# EAGLE board SpiCurrent-beefy (EAGLE 7.2.0)
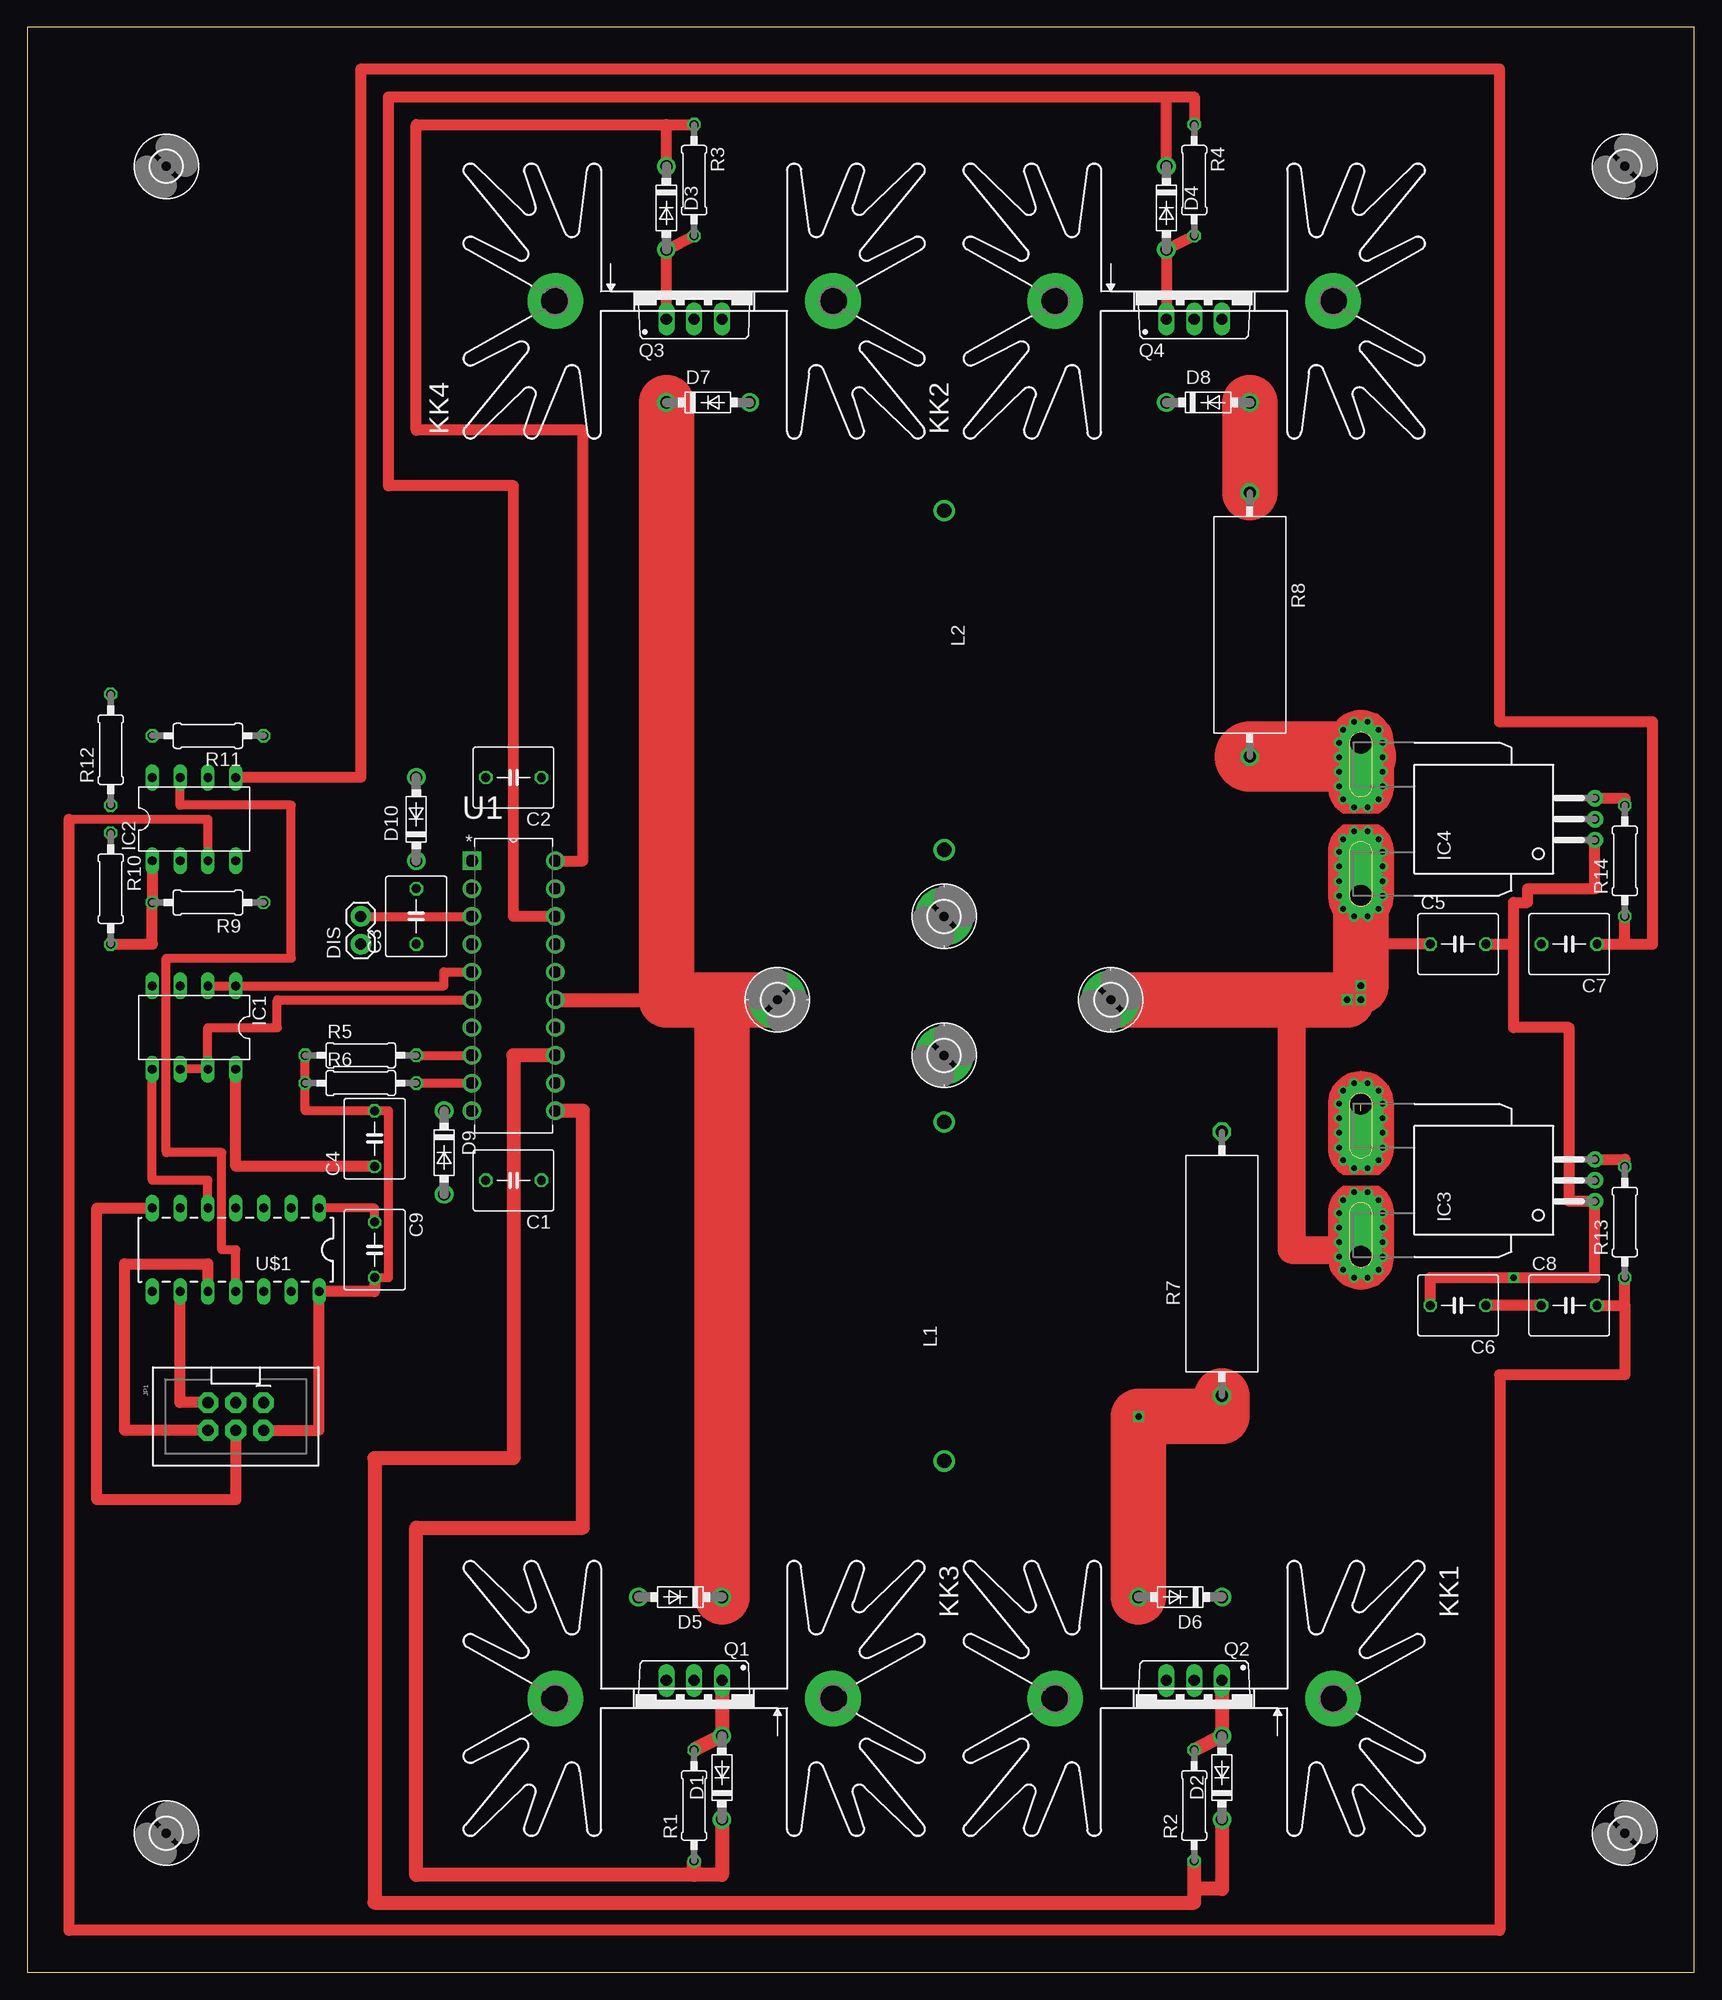
[diagram p0: board, top side]
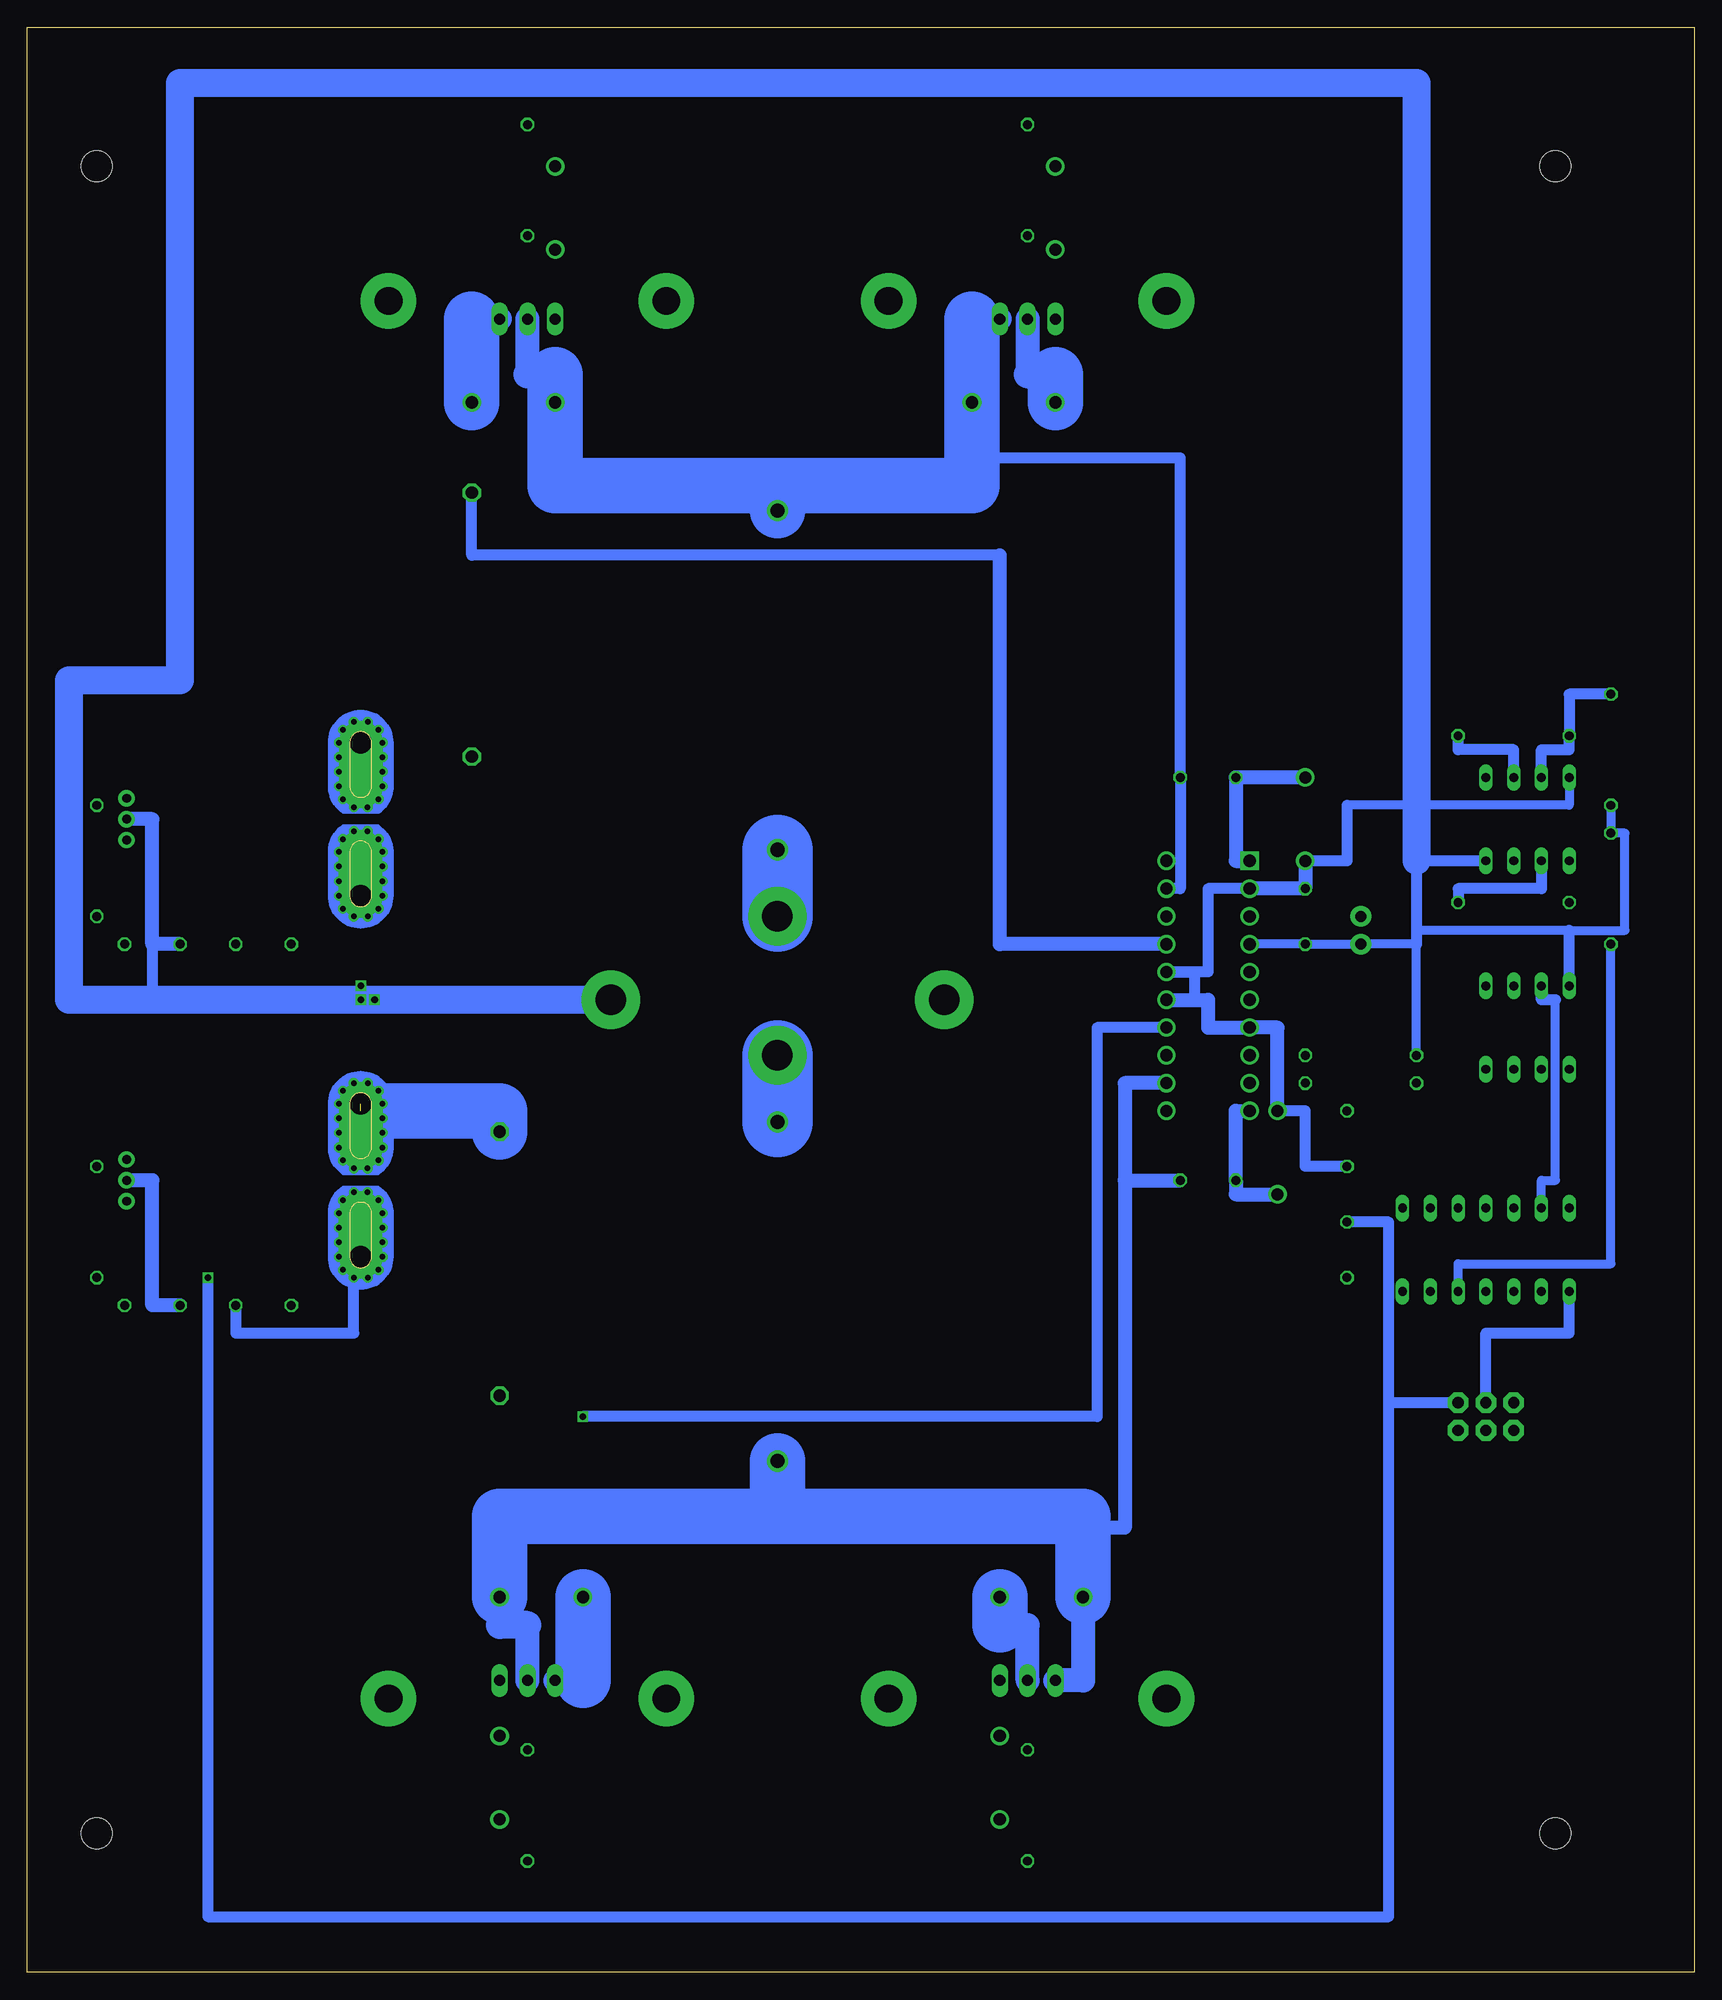
[diagram p1: board, bottom side, seen from below]

Size 152.4 x 177.8 mm. Coordinates in mm from the lower left corner, seen from the top.
Outline: 0,0 152.4,0 152.4,177.8 0,177.8 0,0
Copper layers (1*16): Top 0.0356mm / dielectric 1.5011mm / Bottom 0.0356mm
Design rules "LaenPCBOrder-bigtesting": minimum track width 10mil, minimum drill 13mil, track to track 10mil, track to pad 10mil, pad to pad 10mil, via to via 10mil, smd to smd 10mil, copper to edge 15mil, drill to drill 6mil, minimum pad ring 7mil, minimum via ring 7mil, stop-mask expansion 3mil, vias tented up to drill 0mil, thermal gap 20mil

## Footprints (pad centres in the part's own frame; a part is rotated, then mirrored left to right if it is on the bottom)
C050-055X075 = drill 0.813 octagon: 1 -2.54,0; 2 2.54,0
DO41-7.6 = drill 1.1 pad 1.7: A 3.81,0; C -3.81,0
1X02 = drill 1.016 pad 1.88: 1 0,0; 2 2.54,0
2,8-PAD = drill 2.8 pad 5.334: B2,8 0,0
2,8 = hole 2.8: 0,0
DIL08 = drill 0.813 long: 1 -3.81,-3.81; 2 -1.27,-3.81; 3 1.27,-3.81; 4 3.81,-3.81; 5 3.81,3.81; 6 1.27,3.81; 7 -1.27,3.81; 8 -3.81,3.81
CB-PFF = drill 0.8 pad 1.5: 1 -1.91,-21.4; 2 0,-21.4; 3 1.91,-21.4 | drill 2 pad 4 offset: IP+ 7,0; IP- -7,0 | drill 0.5 pad 0.9: IP+@2 8.89,0.635; IP+@3 8.89,-0.635; IP+@4 8.175,-1.625; IP+@5 7,-2; IP+@6 5.675,-2; IP+@7 4.35,-2; IP+@8 3,-2; IP+@9 1.825,-1.625; IP+@10 1.1,-0.625; IP+@11 1.1,0.625; IP+@12 1.825,1.625; IP+@13 3,2; IP+@14 4.35,2; IP+@15 5.675,2; IP+@16 7,2; IP+@17 8.175,1.625; IP-@2 -8.89,0.635; IP-@3 -8.89,-0.635; IP-@4 -8.175,-1.625; IP-@5 -7,-2; IP-@6 -5.675,-2; IP-@7 -4.325,-2; IP-@8 -3,-2; IP-@9 -1.825,-1.625; IP-@10 -1.1,-0.625; IP-@11 -1.1,0.625; IP-@12 -1.825,1.625; IP-@13 -3,2; IP-@14 -4.325,2; IP-@15 -5.675,2; IP-@16 -7,2; IP-@17 -8.175,1.625
2X3-SPI-SHROUDED = drill 1.016 pad 1.88 octagon: 1 -1.27,2.54; 2 1.27,2.54; 3 -1.27,0; 4 1.27,0; 5 -1.27,-2.54; 6 1.27,-2.54
529XXXXXXXX = drill 2.54 pad 5.08: A2,5 -12.7,-0.889; B2,5 12.7,-0.889
TJ6-U2 = drill 1.3: 1 -15.5,0; 2 15.5,0
TO220BV = drill 1.016 long: D 0,-2.54; G -2.54,-2.54; S 2.54,-2.54
0207/10 = drill 0.813 octagon: 1 -5.08,0; 2 5.08,0
VTA54 = drill 1.1 octagon: 1 -12.065,0; 2 12.065,0
DIP254P762X533-20 = drill 1.118 square: 1 -7.62,22.86 | drill 1.118: 2 -7.62,20.32; 3 -7.62,17.78; 4 -7.62,15.24; 5 -7.62,12.7; 6 -7.62,10.16; 7 -7.62,7.62; 8 -7.62,5.08; 9 -7.62,2.54; 10 -7.62,0; 11 0,0; 12 0,2.54; 13 0,5.08; 14 0,7.62; 15 0,10.16; 16 0,12.7; 17 0,15.24; 18 0,17.78; 19 0,20.32; 20 0,22.86
DIL14 = drill 0.813 long: 1 -8.89,-3.81; 2 -6.35,-3.81; 3 -3.81,-3.81; 4 -1.27,-3.81; 5 1.27,-3.81; 6 3.81,-3.81; 7 6.35,-3.81; 8 6.35,3.81; 9 3.81,3.81; 10 1.27,3.81; 11 -1.27,3.81; 12 -3.81,3.81; 13 -6.35,3.81; 14 -8.89,3.81

## Placement (x,y rotation side)
C1  15-22uf  [C050-055X075]  44.45,72.39 180 top
C2  15-22uf  [C050-055X075]  44.45,109.22 180 top
C3  22uf  [C050-055X075]  35.56,96.52 90 top
C4  4.7uf  [C050-055X075]  31.75,76.2 90 top
C5  0.1uf  [C050-055X075]  130.81,93.98 0 top
C6  0.1uf  [C050-055X075]  130.81,60.96 180 top
C7  ??  [C050-055X075]  140.97,93.98 180 top
C8  ??  [C050-055X075]  140.97,60.96 0 top
C9  0.1uf  [C050-055X075]  31.75,66.04 270 top
D1  1N5819-B  [DO41-7.6]  63.5,17.78 90 top
D2  1N5819-B  [DO41-7.6]  109.22,17.78 90 top
D3  1N5819-B  [DO41-7.6]  58.42,161.29 270 top
D4  1N5819-B  [DO41-7.6]  104.14,161.29 270 top
D5  1N5822  [DO41-7.6]  59.69,34.29 180 top
D6  1N5822  [DO41-7.6]  105.41,34.29 180 top
D7  1N5822  [DO41-7.6]  62.23,143.51 0 top
D8  1N5822  [DO41-7.6]  107.95,143.51 0 top
D9  1N5819-B  [DO41-7.6]  38.1,74.93 270 top
D10  1N5819-B  [DO41-7.6]  35.56,105.41 90 top
DIS  M02PTH  [1X02]  30.48,93.98 90 top
H1  MOUNT-PAD-ROUND2.8  [2,8-PAD]  68.58,88.9 270 top
H2  MOUNT-PAD-ROUND2.8  [2,8-PAD]  99.06,88.9 180 top
H3  MOUNT-PAD-ROUND2.8  [2,8-PAD]  83.82,83.82 0 top
H4  MOUNT-PAD-ROUND2.8  [2,8-PAD]  83.82,96.52 0 top
H5  MOUNT-HOLE2.8  [2,8]  12.7,12.7 0 top
H6  MOUNT-HOLE2.8  [2,8]  146.05,165.1 0 top
H7  MOUNT-HOLE2.8  [2,8]  146.05,12.7 0 top
H8  MOUNT-HOLE2.8  [2,8]  12.7,165.1 0 top
IC1  AD822N  [DIL08]  15.24,86.36 180 top
IC2  AD822N  [DIL08]  15.24,105.41 0 top
IC3  ACS758LCB-050B-PFF-T  [CB-PFF]  121.92,72.39 90 top
IC4  ACS758LCB-050B-PFF-T  [CB-PFF]  121.92,105.41 90 top
JP1  [2X3-SPI-SHROUDED]  19.05,50.8 270 top
KK1  TO-220/218-529XXXXXXXX  [529XXXXXXXX]  106.68,24.13 180 top
KK2  TO-220/218-529XXXXXXXX  [529XXXXXXXX]  106.68,153.67 0 top
KK3  TO-220/218-529XXXXXXXX  [529XXXXXXXX]  60.96,24.13 180 top
KK4  TO-220/218-529XXXXXXXX  [529XXXXXXXX]  60.96,153.67 0 top
L1  ~10uH?  [TJ6-U2]  83.82,62.23 90 top
L2  ~10uH?  [TJ6-U2]  83.82,118.11 270 top
Q1  [TO220BV]  60.96,24.13 180 top
Q2  [TO220BV]  106.68,24.13 180 top
Q3  [TO220BV]  60.96,153.67 0 top
Q4  [TO220BV]  106.68,153.67 0 top
R1  10  [0207/10]  60.96,15.24 90 top
R2  10  [0207/10]  106.68,15.24 90 top
R3  10  [0207/10]  60.96,163.83 270 top
R4  10  [0207/10]  106.68,163.83 270 top
R5  100K  [0207/10]  30.48,83.82 0 top
R6  100K  [0207/10]  30.48,81.28 0 top
R7  1 >5W  [VTA54]  109.22,64.77 90 top
R8  1 >5W  [VTA54]  111.76,123.19 270 top
R9  100K  [0207/10]  16.51,97.79 180 top
R10  150K  [0207/10]  7.62,99.06 270 top
R11  100K  [0207/10]  16.51,113.03 180 top
R12  150K  [0207/10]  7.62,111.76 90 top
R13  ??  [0207/10]  146.05,68.58 90 top
R14  ??  [0207/10]  146.05,101.6 90 top
U1  HIP4081AIPZ  [DIP254P762X533-20]  48.26,78.74 0 top
U$1  ATTINY84ATTINY84-20PU  [DIL14]  17.78,66.04 180 top

## Library data of the parts
C1-C9 L1 L2 = rcl
D1-D10 = diode-custom
DIS = SparkFun-Connectors
H1-H4 = holes-custom
H5-H8 = holes
IC1 IC2 = analog-devices; OC_FARNELL: 1438581; OC_NEWARK: unknown
IC3 IC4 = allegro; MPN: ACS758LCB-050B-PFF-T; OC_FARNELL: 1718997; OC_NEWARK: 04R7131
JP1 = CustomParts; PROD_ID: CONN-10681
KK1-KK4 = heatsink-aavid
Q1-Q4 = transistor-power
R1-R4 = resistor
R5-R14 = resistor-custom
U1 = Intersil_By_element14_Batch_1; MPN: HIP4081AIPZ; OC_FARNELL: 9664130; OC_NEWARK: 57K3817; PACKAGE: DIP-20; SUPPLIER: INTERSIL
U$1 = SparkFun-DigitalIC

## Nets
+5V: C5.2 C6.2 C9.1 IC3.1 IC4.1 JP1.1 U$1.1
+12V: C3.2 C4.1 D5.C D7.C D9.C D10.C H1.B2,8 IC1.8 IC2.8 Q1.D Q3.D U1.2 U1.7 U1.15 U1.16
GND: C3.1 C4.2 C5.1 C6.1 C7.2 C8.1 C9.2 DIS.1 H2.B2,8 IC1.4 IC2.4 IC3.2 IC3.IP- IC3.IP-@2 IC3.IP-@3 IC3.IP-@4 IC3.IP-@5 IC3.IP-@6 IC3.IP-@7 IC3.IP-@8 IC3.IP-@9 IC3.IP-@10 IC3.IP-@11 IC3.IP-@12 IC3.IP-@13 IC3.IP-@14 IC3.IP-@15 IC3.IP-@16 IC3.IP-@17 IC4.2 IC4.IP- IC4.IP-@2 IC4.IP-@3 IC4.IP-@4 IC4.IP-@5 IC4.IP-@6 IC4.IP-@7 IC4.IP-@8 IC4.IP-@9 IC4.IP-@10 IC4.IP-@11 IC4.IP-@12 IC4.IP-@13 IC4.IP-@14 IC4.IP-@15 IC4.IP-@16 IC4.IP-@17 JP1.2 R5.1 R6.1 R10.1 R12.1 U1.4 U$1.14
N$1: IC1.1 IC1.2 U1.5
N$2: IC1.6 IC1.7 U1.6
N$3: D3.C R3.1 U1.20
N$4: D3.A Q3.G R3.2
N$5: D4.C R4.1 U1.18
N$6: D4.A Q4.G R4.2
N$7: D2.C R2.1 U1.13
N$8: D2.A Q2.G R2.2
N$9: D1.C R1.1 U1.11
N$10: D1.A Q1.G R1.2
N$11: C1.1 D5.A D6.C L1.1 Q1.S Q2.D U1.12
N$12: R5.2 U1.8
N$13: R6.2 U1.9
N$14: C2.1 D7.A D8.C L2.1 Q3.S Q4.D U1.19
N$15: D6.A Q2.S R7.1 U1.14
N$16: D8.A Q4.S R8.1 U1.17
N$17: C1.2 D9.A U1.10
N$18: C2.2 D10.A U1.1
N$19: DIS.2 U1.3
N$20: JP1.4 U$1.7
N$21: JP1.3 U$1.8
N$22: JP1.5 U$1.9
N$23: JP1.6 U$1.10
N$24: IC1.5 U$1.5
N$25: IC1.3 U$1.6
N$26: IC2.2 R9.1
N$27: IC4.IP+ IC4.IP+@2 IC4.IP+@3 IC4.IP+@4 IC4.IP+@5 IC4.IP+@6 IC4.IP+@7 IC4.IP+@8 IC4.IP+@9 IC4.IP+@10 IC4.IP+@11 IC4.IP+@12 IC4.IP+@13 IC4.IP+@14 IC4.IP+@15 IC4.IP+@16 IC4.IP+@17 R8.2
N$28: IC2.1 R9.2 R10.2 U$1.12
N$29: IC2.7 R11.2 R12.2 U$1.11
N$30: IC2.6 R11.1
N$31: IC3.IP+ IC3.IP+@2 IC3.IP+@3 IC3.IP+@4 IC3.IP+@5 IC3.IP+@6 IC3.IP+@7 IC3.IP+@8 IC3.IP+@9 IC3.IP+@10 IC3.IP+@11 IC3.IP+@12 IC3.IP+@13 IC3.IP+@14 IC3.IP+@15 IC3.IP+@16 IC3.IP+@17 R7.2
N$32: C8.2 IC2.3 R13.1
N$33: C7.1 IC2.5 R14.1
N$34: IC3.3 R13.2
N$35: IC4.3 R14.2
N$36: H3.B2,8 L1.2
N$37: H4.B2,8 L2.2

## Tracks (layer width: path | path; a pad name or v marks a point on that pad's centre or on a via)
+5V  (via drill 0.6)
  Top 0.813: C9.1 31.75,69.85 U$1.1
  Top 1.016: IC4.1 143.32,99.06 137.16,99.06 137.16,97.79 135.89,97.79 135.89,93.98 | C6.2 128.27,63.5 v135.89,63.5 143.32,63.5 IC3.1 140.97,70.48 140.97,86.36 135.89,86.36 135.89,93.98 | C5.2 135.89,93.98
  Bottom 1.016: v135.89,63.5 135.89,5.08 27.94,5.08 27.94,52.07 | 27.94,52.07 JP1.1 | 27.94,52.07 27.94,68.58 C9.1
+12V
  Top 1.016: C4.1 19.05,73.66 IC1.8
  Top 1.27: U1.15 58.42,88.9
  Top 5.08: D5.C 63.5,88.9 | 63.5,88.9 H1.B2,8 | 63.5,88.9 58.42,88.9 D7.C
  Bottom 0.813: IC2.8 11.43,106.68 31.75,106.68
  Bottom 1.016: C4.1 35.56,73.66 35.56,78.74 D9.C | U1.2 44.45,99.06 44.45,91.44 U1.16 45.72,91.44 45.72,88.9 | 31.75,106.68 31.75,101.6 D10.C
  Bottom 1.27: U1.15 45.72,88.9 44.45,88.9 44.45,86.36 U1.7 38.1,86.36 D9.C | U1.2 C3.2 D10.C
  Bottom 2.184: Q3.D 60.96,146.05 | Q1.D 60.96,31.75 63.5,31.75
  Bottom 2.54: 60.96,146.05 58.42,146.05
  Bottom 5.08: 58.42,146.05 D7.C | 63.5,31.75 D5.C
GND  (via drill 0.6)
  Top 0.813: R5.1 R6.1 25.4,78.74 C4.2 33.02,78.74 33.02,63.5 C9.2
  Top 1.016: C8.1 C6.1 | C9.2 31.75,62.23 U$1.14 26.67,49.53 JP1.2 | C5.1 121.92,93.98
  Top 2.54: v121.92,90.17 v121.92,88.9 v120.65,88.9 | 115.57,88.9 115.57,66.04 121.92,66.04 IC3.IP-
  Top 5.08: H2.B2,8 115.57,88.9 v120.65,88.9 | v121.92,90.17 121.92,93.98 IC4.IP-
  Bottom 0.813: R5.1 25.4,93.98 DIS.1 C3.1 U1.4 | R12.1 R10.1 6.35,104.14 6.35,95.25 11.43,95.25 25.4,95.25
  Bottom 1.016: C6.1 133.35,58.42 122.56,58.42 IC3.IP-@3 | 25.4,93.98 25.4,95.25 25.4,101.6 IC2.4 | IC1.4 11.43,95.25 | 140.97,93.98 140.97,88.9
  Bottom 1.27: C7.2 140.97,93.98 140.97,105.41 IC4.2 | C8.1 140.97,60.96 140.97,72.39 IC3.2
  Bottom 2.54: H2.B2,8 140.97,88.9 148.59,88.9 148.59,118.11 138.43,118.11 138.43,172.72 25.4,172.72 25.4,101.6
N$1
  Top 0.813: IC1.2 IC1.1 38.1,90.17 38.1,91.44 U1.5
N$2
  Top 0.813: U1.6 22.86,88.9 22.86,86.36 16.51,86.36 IC1.7 IC1.6
N$3
  Top 1.016: D3.C 58.42,168.91 | 58.42,168.91 R3.1 | U1.20 50.8,101.6 50.8,140.97 35.56,140.97 35.56,168.91 58.42,168.91
N$4
  Top 1.016: Q3.G D3.A R3.2
N$5
  Top 1.016: D4.C 104.14,171.45 | 104.14,171.45 106.68,171.45 R4.1 | U1.18 44.45,96.52 44.45,135.89 33.02,135.89 33.02,171.45 104.14,171.45
N$6
  Top 1.016: Q4.G D4.A R4.2
N$7
  Top 1.27: D2.C 109.22,7.62 106.68,7.62 | U1.13 44.45,83.82 44.45,46.99 31.75,46.99 31.75,6.35 106.68,6.35 106.68,7.62 | 106.68,7.62 R2.1
N$8
  Top 1.27: Q2.G D2.A R2.2
N$9
  Top 1.27: 60.96,8.89 63.5,8.89 D1.C | 60.96,8.89 R1.1 | 60.96,8.89 35.56,8.89 35.56,40.64 50.8,40.64 50.8,78.74 U1.11
N$10
  Top 1.27: Q1.G D1.A R1.2
N$11
  Bottom 1.27: U1.12 52.07,81.28 52.07,72.39 | 52.07,72.39 C1.1 | 52.07,72.39 52.07,40.64 55.88,40.64
  Bottom 2.184: D5.A 55.88,26.67 Q1.S | Q2.D 106.68,31.75 | 109.22,31.75 D6.C
  Bottom 2.54: 106.68,31.75 109.22,31.75 | 55.88,41.65 55.88,40.64
  Bottom 5.08: D6.C 109.22,41.65 83.82,41.65 | 55.88,40.64 D5.A | 55.88,41.65 83.82,41.65 | 83.82,41.65 L1.1
N$12
  Top 0.813: R5.2 U1.8
N$13
  Top 0.813: R6.2 U1.9
N$14
  Bottom 1.016: U1.19 46.99,99.06 C2.1 46.99,138.43 66.04,138.43 66.04,138.69
  Bottom 2.184: 106.68,146.05 Q4.D | Q3.S 66.04,151.13
  Bottom 2.54: 104.14,146.05 106.68,146.05
  Bottom 5.08: 104.14,146.05 D8.C 104.14,135.89 83.82,135.89 | 66.04,151.13 D7.A 66.04,138.69 66.04,135.89 83.82,135.89 | 83.82,135.89 L2.1
N$15  (via drill 0.6)
  Top 5.08: D6.A v101.6,50.8 109.22,50.8 R7.1
  Bottom 1.016: U1.14 54.61,86.36 54.61,50.8 v101.6,50.8
  Bottom 2.184: Q2.S 101.6,26.67
  Bottom 5.08: 101.6,26.67 D6.A
N$16
  Top 5.08: D8.A R8.1
  Bottom 1.016: 63.5,129.54 111.76,129.54 R8.1
  Bottom 1.27: U1.17 63.5,93.98 63.5,129.54
  Bottom 2.184: Q4.S 111.76,151.13
  Bottom 5.08: 111.76,151.13 D8.A
N$17
  Bottom 1.27: U1.10 41.91,78.74 C1.2 41.91,71.12 D9.A
N$18
  Bottom 1.27: U1.1 41.91,101.6 C2.2 D10.A
N$19
  Top 0.813: DIS.2 U1.3
N$20
  Top 1.016: JP1.4 19.05,43.18 6.35,43.18 6.35,69.85 U$1.7
N$21
  Bottom 1.016: JP1.3 19.05,58.42 11.43,58.42 U$1.8
N$22
  Top 1.016: JP1.5 13.97,52.07 U$1.9
N$23
  Top 1.016: JP1.6 8.89,49.53 8.89,64.77 16.51,64.77 U$1.10
N$24
  Top 0.813: U$1.5 16.51,72.39 11.43,72.39 IC1.5
N$25
  Bottom 0.813: U$1.6 13.97,72.39 12.7,72.39 12.7,88.9
  Bottom 1.016: 12.7,88.9 13.97,88.9 IC1.3
N$26
  Bottom 1.016: IC2.2 13.97,99.06 21.59,99.06 R9.1
N$27
  Top 2.54: 121.92,111.12 IC4.IP+
  Top 6.452: R8.2 121.92,111.12
N$28
  Top 1.016: IC2.1 R9.2 11.43,93.98 R10.2
  Bottom 0.813: U$1.12 21.59,64.77 7.62,64.77 R10.2
N$29
  Top 0.813: U$1.11 19.05,66.04 17.78,66.04 17.78,74.93 12.7,74.93 12.7,92.71 24.13,92.71 24.13,106.68 13.97,106.68 IC2.7
  Bottom 1.016: R12.2 11.43,116.84 R11.2 11.43,111.76 13.97,111.76 IC2.7
N$30
  Bottom 1.016: IC2.6 16.51,111.76 21.59,111.76 R11.1
N$31  (1 unrouted)
  Bottom 5.08: R7.2 109.22,78.74 121.92,78.74
N$32
  Top 0.813: 3.81,105.41 16.51,105.41 IC2.3
  Top 1.016: 146.05,60.96 R13.1 | C8.2 146.05,60.96 | 146.05,60.96 146.05,54.61 134.62,54.61 134.62,3.81 3.81,3.81 3.81,105.41
N$33
  Top 1.016: R14.1 146.05,93.98 C7.1 148.59,93.98 148.59,114.3 134.62,114.3 134.62,173.99 30.48,173.99 30.48,109.22 IC2.5
N$34
  Top 1.016: IC3.3 146.05,74.3 R13.2
N$35
  Top 1.016: IC4.3 146.05,107.32 R14.2
N$36
  Bottom 6.452: L1.2 H3.B2,8
N$37
  Bottom 6.452: L2.2 H4.B2,8